# Altium PCB T61_LC_Scanner.PcbDoc
Units mm, origin at the board's own origin, x right, y up, seen from the top; angles counter-clockwise.
Board outline 49.8 x 49.8 mm, 4 copper layers (Top, Route2, Route15, Bottom), stack 0.461 mm thick; 16 components, 35 nets, 111 pads, 17 vias.
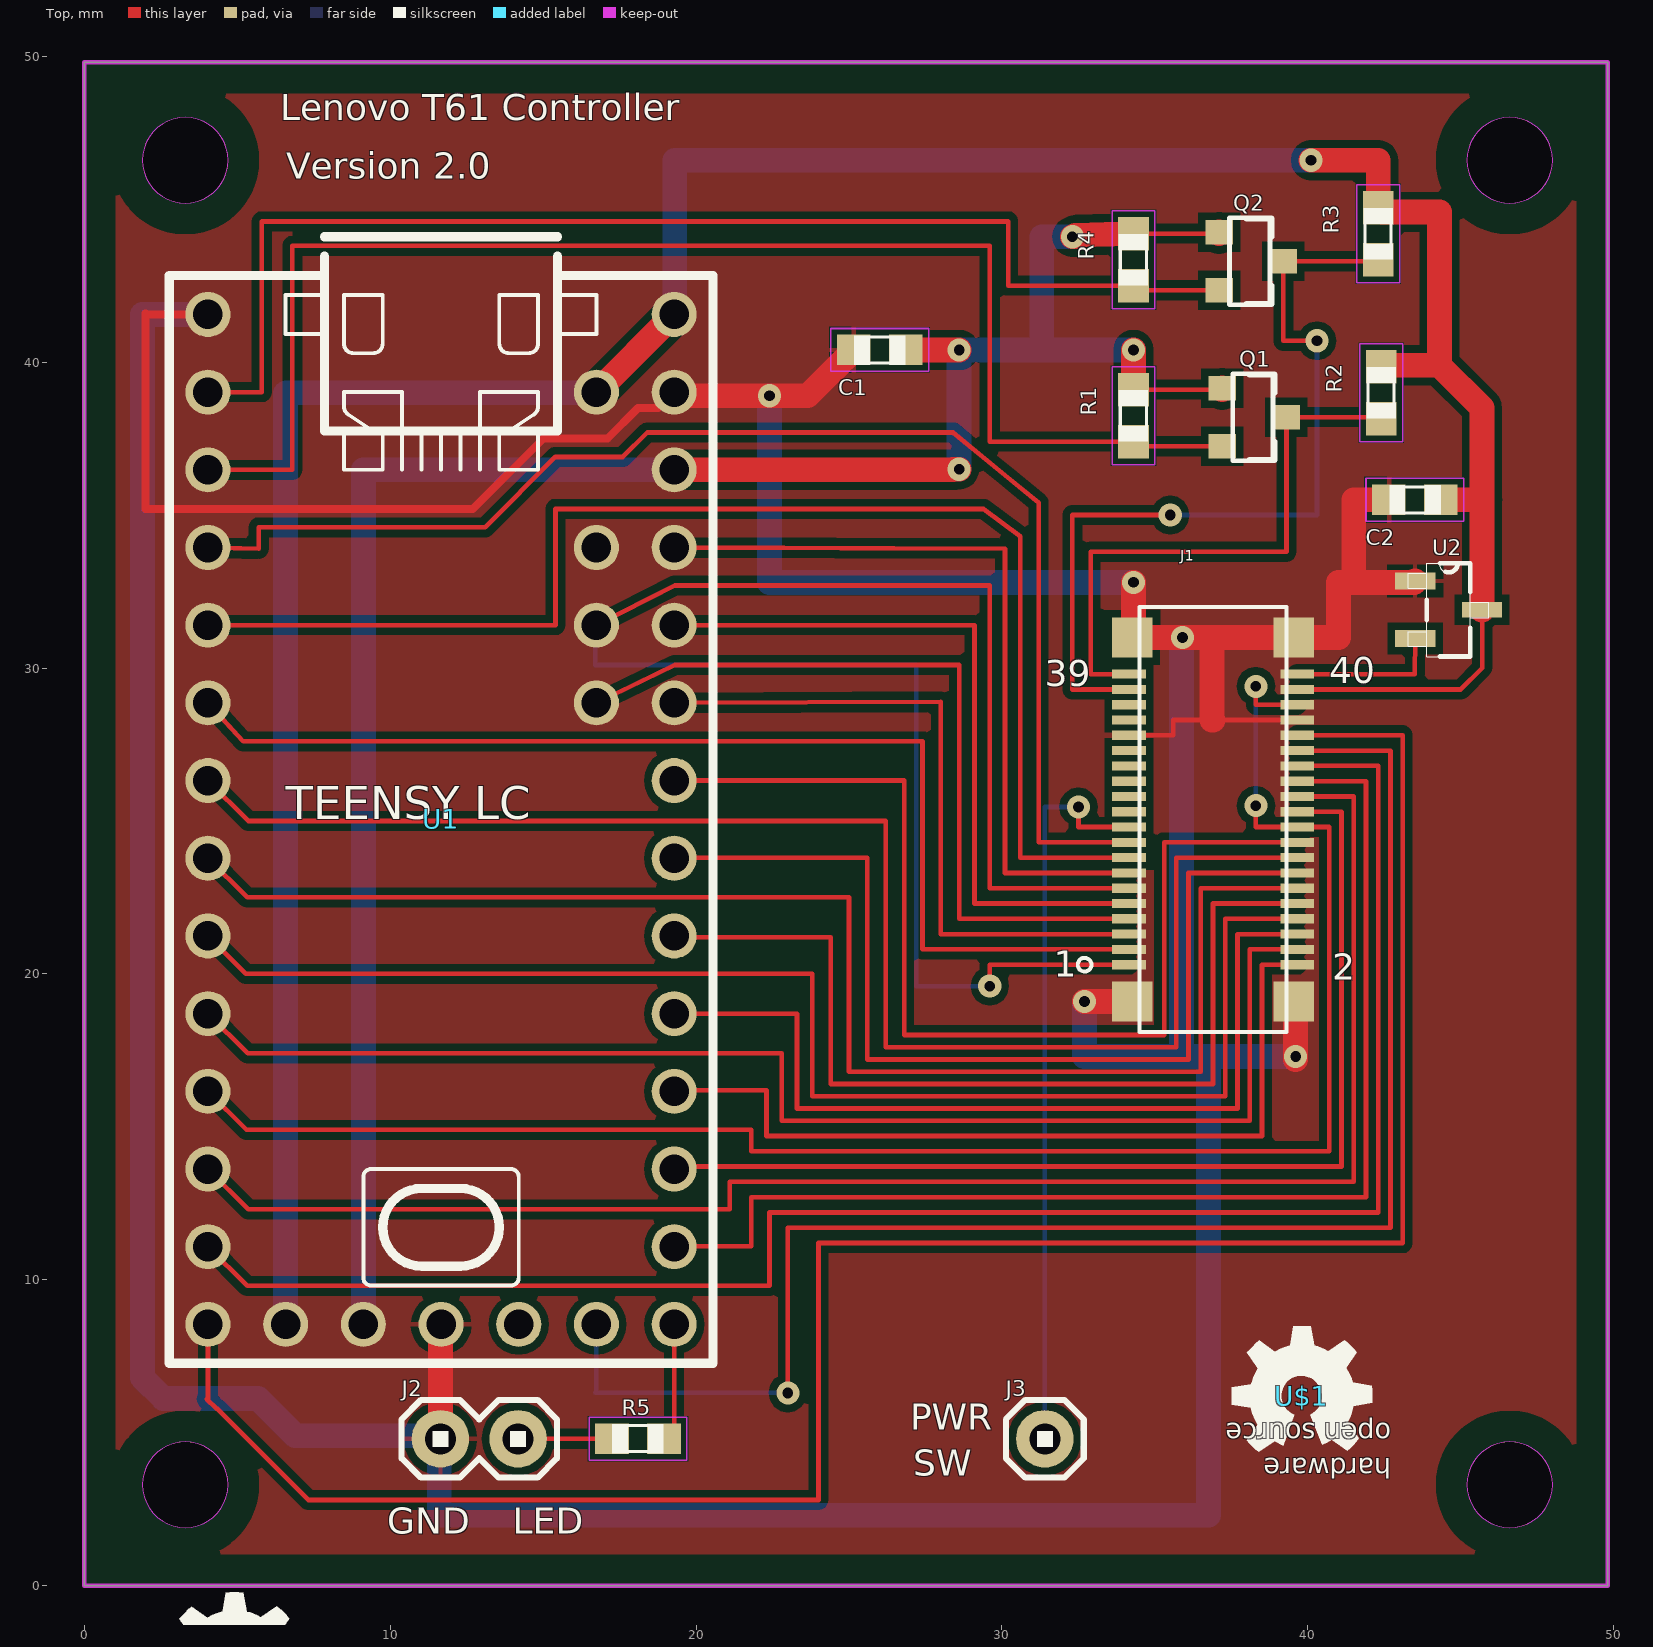
[diagram p0: Top view]
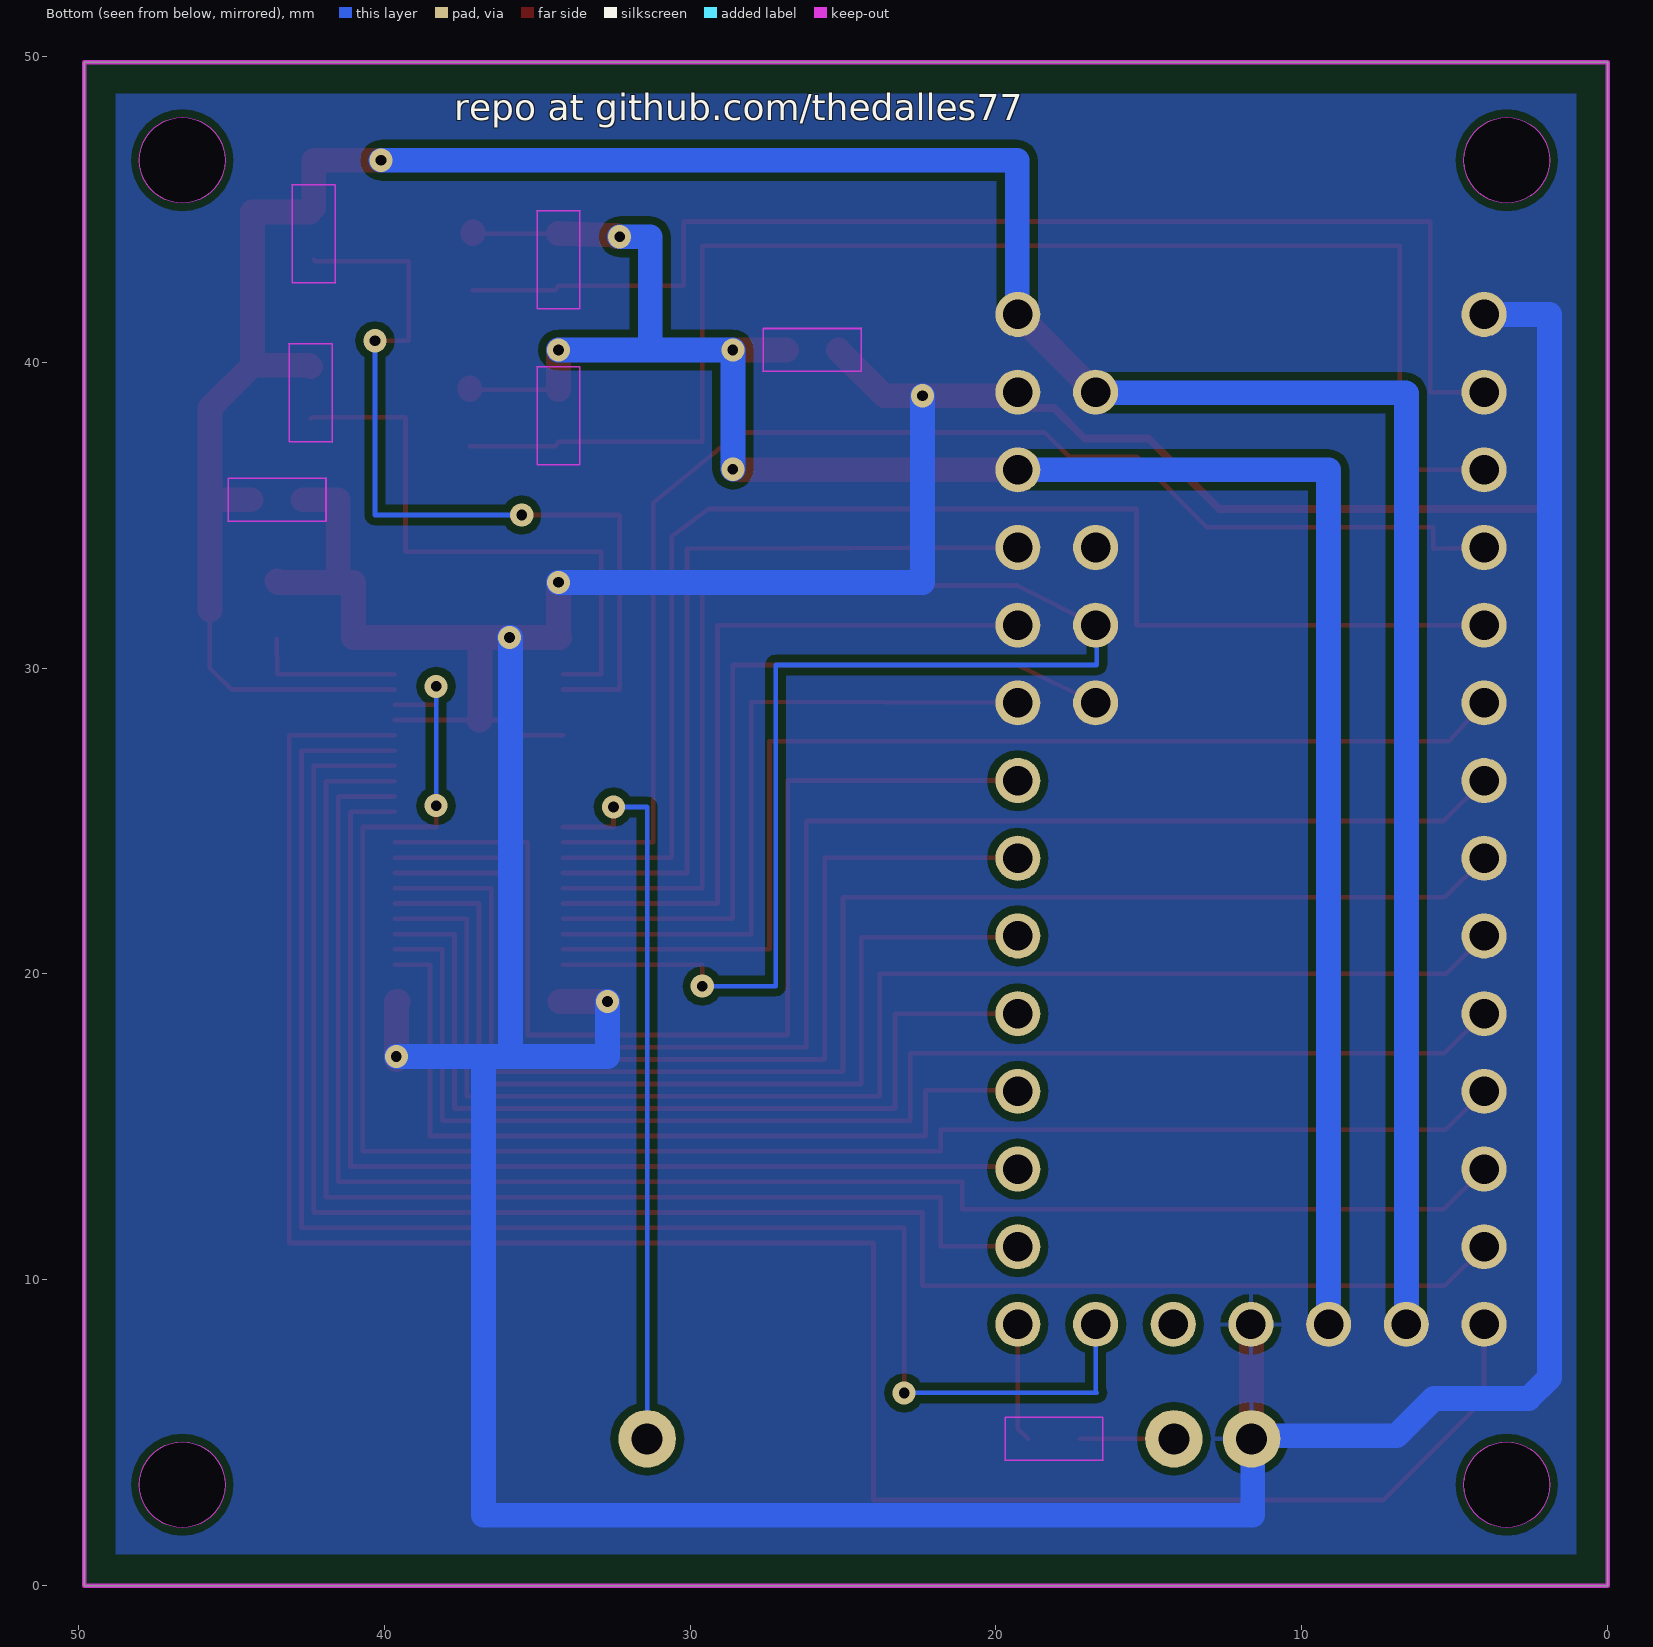
[diagram p1: Bottom view, seen from below]

## Layer stack, top to bottom
Top Solder: solder mask 0.0102, Solder Resist, Dk 3.5
Top: signal copper 0.035
Dielectric 1: dielectric 0.32, FR-4, Dk 4.8
Route2: signal copper 0.0356
Route15: signal copper 0.0356
Bottom: signal copper 0.035
Bottom Solder: solder mask 0.0102, Solder Resist, Dk 3.5

## Board outline
0,49.8 0,0 49.8,0 49.8,49.8
cut-out: 46.6,45.2 ccw(c46.6,46.6) 48,46.6 ccw(c46.6,46.6) 46.6,48 ccw(c46.6,46.6) 45.2,46.6 ccw(c46.6,46.6)
cut-out: 3.3,45.2 ccw(c3.3,46.6) 4.7,46.6 ccw(c3.3,46.6) 3.3,48 ccw(c3.3,46.6) 1.9,46.6 ccw(c3.3,46.6)
cut-out: 3.3,1.9 ccw(c3.3,3.3) 4.7,3.3 ccw(c3.3,3.3) 3.3,4.7 ccw(c3.3,3.3) 1.9,3.3 ccw(c3.3,3.3)
cut-out: 46.6,1.9 ccw(c46.6,3.3) 48,3.3 ccw(c46.6,3.3) 46.6,4.7 ccw(c46.6,3.3) 45.2,3.3 ccw(c46.6,3.3)

## Design rules (kind name [scope] priority, off if disabled: settings)
BoardOutlineClearance mdCopperDimension [All] p1: gap=0.254 ignorepadtopadclearanceinfootprint=FALSE except(0: Arc-SplitContinuation Track-SplitContinuation SMDPad-SplitContinuation THPad-SplitContinuation Via-SplitContinuation Fill-SplitContinuation Poly-SplitContinuation Region-SplitContinuation Text-SplitContinuation; 1.016: Poly-OutlineEdge Poly-CavityEdge Poly-CutoutEdge Poly-SplitBarrior)
Clearance Clearance_for_PolygonClass_Isolate_10 [InPolygonClass('Isolate_10') vs IsArc Or IsTrack Or IsPad Or IsVia Or IsFill Or IsRegion Or IsText] p1: gap=0.254 ignorepadtopadclearanceinfootprint=FALSE
Clearance "Clearance (Same Net)" [All] p2: gap=0.152 ignorepadtopadclearanceinfootprint=FALSE
Clearance [All] p3: gap=0.152 ignorepadtopadclearanceinfootprint=FALSE
HoleSize [All] p1: absolutevalues=TRUE maxlimit=2540 minlimit=0.35 maxpercent=80.000 minpercent=20.000
HoleToHoleClearance mdDrill [All] p1: gap=0.152 allowstackedmicrovias=TRUE
MinimumSolderMaskSliver [All] p1 off: minsoldermaskwidth=0.254
PasteMaskExpansion mlMinCreamFrame [All] p1: expansion=0
PolygonConnect PolygonConnect_For_PolygonThermal_ON_Width60000_Gap100000 [InPolygonClass('PolygonThermal_ON_Width60000_Gap100000') vs Not IsVia] p1: connectstyle=Relief reliefconductorwidth=0.152 reliefentries=4 polygonreliefangle="90 Angle" airgapwidth=0.254
PolygonConnect ThermalVias [IsVia] p2: connectstyle=Direct reliefconductorwidth=0.254 reliefentries=4 polygonreliefangle="90 Angle" airgapwidth=0.254
PolygonConnect [All] p3: connectstyle=Relief reliefconductorwidth=0.254 reliefentries=4 polygonreliefangle="90 Angle" airgapwidth=0.254
RoutingVias [All] p1: holewidth=0.35 width=0.756 viastyle="Through Hole" minholewidth=0.35 minwidth=0.756 maxholewidth=2.54 maxwidth=2.54
SolderMaskExpansion mlMinStopFrame [All] p1: expansion=0.102 istentingtop=FALSE
Width [All] p1: maxlimit=0.254 minlimit=0.152 preferedwidth=0.152
26 further rules are at their usual default settings.

## Classes and differential pairs
polygon class PolygonThermal_ON_Width60000_Gap100000: Polygon_1_Net_GND Polygon_2_Net_GND
polygon class Isolate_10: Polygon_1_Net_GND Polygon_2_Net_GND

## Components (designator, comment, footprint, x,y, rotation, side; value= is the part's Value field where it differs from the comment)
C1 "0.1uF" 0603 26,40.4 r180 top
C2 "0.1uF" 0603 43.5,35.5 r180 top
GOLD_ORB_SM1 "" OSHW_5MM 4.9,-2.5 r0 top
J1 "WM6787CT-ND" WM6787CT-ND 37,25 r90 top
J2 "2" 1X02 11.64,4.8 r0 top
J3 "3" 1X01 31.4,4.8 r0 top
Q1 "220mA/50V/3.5Ω" SOT23-3 38.2,38.2 r270 top
Q2 "220mA/50V/3.5Ω" SOT23-3 38.1,43.3 r270 top
R1 "10k" 0603 34.3,38.25 r90 top
R2 "10k" 0603 42.4,39 r90 top
R3 "10k" 0603 42.3,44.2 r90 top
R4 "10k" 0603 34.3,43.35 r90 top
R5 "715" 0603 18.1,4.8 r0 top
U1 "" TEENSY_LC 11.66,25.05 r270 top
U2 "" SOT95P237X112-3N 44.6,31.9 r0 top
U$1 "" OSHW_5MM 39.8,6.2 r0 top

## Footprints (in the part's own frame and the unit in brackets; to place one, negate y for a bottom-side part, rotate by r counter-clockwise, add the part's x,y. Pads: shape width x height; smd on the part's side, far side on the other; paste and mask are expansions set on the pad)
1X01 [mil] "1X01"
  round 74 hole 40: 1(0,0)
  silkscreen extent -50,-50 50,50
1X02 [mil] "1X02"
  round 74 hole 40: 1(0,0) 2(100,0)
  silkscreen extent -50,-50 150,50
0603 [mm] "0603"
  rect 1.1x1 smd: 1(-0.85,0) 2(0.85,0)
  Keep-Out Layer lines w0.051: 1.6,0.7 1.6,-0.7 -1.6,-0.7 -1.6,0.7 1.6,0.7
  silkscreen extent -0.84,-0.47 0.83,0.48
OSHW_5MM [mm] "OSHW_5MM"
  silkscreen extent -2.29,-1.83 2.31,2.29
SOT23-3 [mil] "SOT23-3"
  rect 31.5x35.43 smd: 1(-37.4,-39.37) 2(37.4,-39.37) 3(0,43.31)
  silkscreen extent -56,-26 56,28
SOT95P237X112-3N [mil] "SOT95P237X112-3N"
  rect 52x22 smd: 1(-43,37) 2(-43,-37)
  rect 52x20 smd: 3(43,0)
  silkscreen extent -52,-60 52,60
TEENSY_LC [mil] "TEENSY_LC"
  round 58 hole 38: 0(-550,-300) 1(-450,-300) 2(-350,-300) 3(-250,-300) 3V1(-450,300) 3V2(650,-100) 4(-150,-300) 5(-50,-300) 5V(-650,300) 6(50,-300) 7(150,-300) 8(250,-300) 9(350,-300) 10(450,-300) 11(550,-300) 12(650,-300) 13(650,300) 14(550,300) 15(450,300) 16(350,300) 17(250,300) 18(150,300) 19(50,300) 20(-50,300) 21(-150,300) 22(-250,300) 23(-350,300) 24(-250,200) 25(-150,200) 26(650,200) AREF(-350,200) GND1(-650,-300) GND2(-550,300) GND3(650,0) PGM(650,100) VIN(650,-200) VUSB(-550,200)
  silkscreen extent -750,-350 700,350
WM6787CT-ND [mm] "WM6787CT-ND"
  rect 0.3x1.1 smd: P$1(-4.7,2.85) P$2(-4.7,-2.65) P$3(-4.2,2.85) P$4(-4.2,-2.65) P$5(-3.7,2.85) P$6(-3.7,-2.65) P$7(-3.2,2.85) P$8(-3.2,-2.65) P$9(-2.7,2.85) P$10(-2.7,-2.65) P$11(-2.2,2.85) P$12(-2.2,-2.65) P$13(-1.7,2.85) P$14(-1.7,-2.65) P$15(-1.2,2.85) P$16(-1.2,-2.65) P$17(-0.7,2.85) P$18(-0.7,-2.65) P$19(-0.2,2.85) P$20(-0.2,-2.65) P$21(0.3,2.85) P$22(0.3,-2.65) P$23(0.8,2.85) P$24(0.8,-2.65) P$25(1.3,2.85) P$26(1.3,-2.65) P$27(1.8,2.85) P$28(1.8,-2.65) P$29(2.3,2.85) P$30(2.3,-2.65) P$31(2.8,2.85) P$32(2.8,-2.65) P$33(3.3,2.85) P$34(3.3,-2.65) P$35(3.8,2.85) P$36(3.8,-2.65) P$37(4.3,2.85) P$38(4.3,-2.65) P$39(4.8,2.85) P$40(4.8,-2.65)
  rect 1.3x1.32 smd: P$41(-5.9,2.74) P$42(-5.9,-2.54) P$43(6,2.74) P$44(6,-2.54)
  silkscreen extent -6.9,-2.3 7,4.52

## Part data
C1 C2 R1 R2 R3 R4 R5: library part 0603, PackageName=0603
GOLD_ORB_SM1 U$1: library part OSHW_5MM, PackageName=OSHW_5MM
J2: library part 1X02, PackageName=1X02
J3: library part 1X01, PackageName=1X01
Q1 Q2: library part SOT23-3, PackageName=SOT23-3
U1: library part TEENSY_LC, PackageName=TEENSY_LC
U2: library part SOT95P237X112-3N, PackageName=SOT95P237X112-3N
J1: PackageName=WM6787CT-ND

## Free pads (board coordinates)
  round 2.8 hole 2.8 unplated: MH1(3.3,3.3) MH2(46.6,3.3) MH3(46.6,46.6) MH4(3.3,46.6)

## Via types
v1: diameter 0.756/0.756/0.756/0.756 (per signal layer), hole 0.35, Top to Bottom, 17 vias

## Nets (pads, with @x,y where several pads share a name; then routed paths per layer and width w, separated by ;. In a path a pad name is that pad's centre, name@x,y a point inside that pad or via, vN(x,y) a via of type N, cw(c..) or ccw(c..) an arc to the next point about the centre after c; other vN are vias at no path point)
3V: C1.1 Q1.1 Q2.1 R1.2 R4.2 U1.3V1 U1.3V2 | length 72.6
  Top w0.152: R1.2 Q1.1@37.2,39.1 ; R4.2 Q2.1@37.1,44.2
  Top w0.813: U1.3V1 28.4,36.48 28.4,36.5 v1(28.6,36.5) ; C1.1 v1(28.6,40.4) ; v1(32.3,44.1) 32.4,44.1 32.4,44.15 R4.2 ; R1.2 v1(34.3,40.4) ; Q2.1@37.1,44.2 Q2.1 ; Q1.1@37.2,39.1 Q1.1
  Bottom w0.813: U1.3V2 9.12,36.48 U1.3V1 ; v1(28.6,36.5) v1(28.6,40.4) 31.3,40.4 ; v1(32.3,44.1) 31.3,44.1 31.3,40.4 ; v1(34.3,40.4) 31.3,40.4
5V: C2.1 J1.P$38 R2.2 R3.2 U1.5V U1.VIN U1.VUSB U2.3 | length 101.9
  Top w0.152: J1.P$38 45,29.3 45.7,30 45.7,31.892 U2.3 ; R3.2 42.3,44.908 43.3,44.908
  Top w0.813: U1.VUSB U1.5V ; v1(40.1,46.6) 42.3,46.6 R3.2 ; R2.2 42.45,39.9 44.3,39.9 ; R3.2@42.441,44.908 43.3,44.908 44.3,44.908 44.3,39.9 ; C2.1 45.7,35.5 45.692,35.492 ; U2.3 45.692,35.492 ; 44.3,39.9 45.692,38.508 45.692,35.492
  Bottom w0.813: U1.VIN 6.58,38.98 6.6,39 16.72,39 U1.VUSB ; U1.5V 19.3,41.58 19.3,46.6 v1(40.1,46.6)
CAPS_LCK: J2.2 R5.1 | length 3.1
  Top w0.152: J2.2 R5.1
CLK: Q1.2 R1.1 U1.1 | length 47
  Top w0.152: U1.1 6.8,36.48 6.8,43.8 29.6,43.8 29.6,37.4 R1.1 34.4,37.25 Q1.2
DATA: Q2.2 R4.1 U1.0 | length 40.8
  Top w0.152: U1.0 5.8,39.02 5.8,44.6 30.2,44.6 30.2,42.5 R4.1 34.4,42.35 Q2.2
DRV(9): J1.P$20 J1.P$36 U1.9 | length 57.4
  Top w0.152: U1.9 5.3,14.9 21.8,14.9 21.8,14.2 40.7,14.2 40.7,24.8 J1.P$20 38.3,24.8 v1(38.3,25.5) ; v1(38.3,29.4) 38.3,28.8 J1.P$36
  Bottom w0.152: v1(38.3,25.5) v1(38.3,29.4)
GND: C1.2 C2.2 J1.P$31 J1.P$34 J1.P$41 J1.P$42 J1.P$43 J1.P$44 J2.1 U1.GND1 U1.GND2 U1.GND3 U2.1 | length 197.2
  Top w0.152: U1.GND3@11.64,8.52 U1.GND3 ; J1.P$31 35.6,27.8 35.6,28.3 36.9,28.3 J1.P$34
  Top w0.254: U1.GND1 2.04,41.56 2,41.6 2,35.2 12.7,35.2 15,37.5 17.1,37.5 18.1,38.5 18.76,38.5 U1.GND2
  Top w0.813: J2.1 U1.GND3@11.64,8.52 ; U1.GND2 19.4,38.9 v1(22.4,38.9) 23.65,38.9 C1.2 ; v1(32.7,19.1) J1.P$41 ; v1(34.3,32.8) 34.3,31 J1.P$43 v1(35.9,31) 36.869,31 ; 36.9,28.3 36.869,28.3 36.869,31 ; J1.P$42 39.6,19.1 v1(39.6,17.3) v1@39.6,17.2 ; C2.2 41.5,35.5 41.5,32.826 41.526,32.8 ; U2.1 43.468,32.8 41.526,32.8 ; 36.869,31 J1.P$44 41,31 41,32.8 41.526,32.8
  Bottom w0.813: U1.GND1 1.9,41.56 1.9,6.8 2.578,6.122 5.678,6.122 6.9,4.9 11.54,4.9 J2.1 11.6,4.8 11.6,2.3 36.753,2.3 36.753,17.3 ; v1(22.4,38.9) 22.4,32.8 v1(34.3,32.8) ; v1(32.7,19.1) 32.7,17.3 35.868,17.3 ; v1(35.9,31) 35.868,31 35.868,17.3 ; v1(39.6,17.3) 36.753,17.3 ; 35.868,17.3 36.753,17.3
LED_13: R5.2 U1.13 | length 3.9
  Top w0.152: R5.2 19.28,5.13 U1.13
N$1: J1.P$5 U1.21 | length 22.5
  Top w0.152: U1.21 28,28.9 28,21.3 J1.P$5
N$2: J1.P$13 U1.23 | length 25.5
  Top w0.152: U1.23 30.1,33.9 30.1,23.3 J1.P$13
N$3: J1.P$9 U1.22 | length 24
  Top w0.152: U1.22 29.1,31.4 29.1,22.3 J1.P$9
N$4: J1.P$7 U1.25 | length 26
  Top w0.152: U1.25 19.3,30.1 28.6,30.1 28.6,21.8 J1.P$7
N$5: J1.P$3 U1.4 | length 37.5
  Top w0.152: U1.4 5.2,27.6 27.4,27.6 27.4,20.8 J1.P$3
N$6: J1.P$15 U1.3 | length 44.7
  Top w0.152: U1.3 15.4,31.4 15.4,35.2 29.4,35.2 30.6,34.3 30.6,23.8 J1.P$15
N$7: J1.P$17 U1.2 | length 44
  Top w0.152: U1.2 5.7,33.9 5.7,34.6 13.1,34.6 15.4,36.9 17.6,36.9 18.4,37.7 28.4,37.7 30.1,36.3 31.2,35.4 31.2,24.3 J1.P$17
N$8: J1.P$22 U1.15 | length 34.9
  Top w0.152: U1.15 19.28,13.7 41.1,13.7 41.1,25.3 J1.P$22
N$9: J1.P$18 U1.20 | length 35
  Top w0.152: U1.20 26.8,26.32 26.8,18 35.3,18 35.3,24.3 J1.P$18
N$10: J1.P$14 U1.19 | length 33.1
  Top w0.152: U1.19 19.28,23.8 25.6,23.8 25.6,17.2 36.1,17.2 36.1,23.3 J1.P$14
N$11: J1.P$10 U1.18 | length 31.1
  Top w0.152: U1.18 19.28,21.2 24.4,21.2 24.4,16.4 36.9,16.4 36.9,22.3 J1.P$10
N$12: J1.P$2 U1.16 | length 27.5
  Top w0.152: U1.16 19.28,16.2 22.3,16.2 22.3,14.7 38.5,14.7 38.5,20.3 J1.P$2
N$13: J1.P$4 U1.8 | length 43.9
  Top w0.152: U1.8 5.34,17.4 22.8,17.4 22.8,15.2 38.1,15.2 38.1,20.8 J1.P$4
N$14: J1.P$8 U1.7 | length 45.9
  Top w0.152: U1.7 5.28,20 23.8,20 23.8,16 37.3,16 37.3,21.8 J1.P$8
N$15: J1.P$12 U1.6 | length 47.8
  Top w0.152: U1.6 5.32,22.5 25,22.5 25,16.8 36.5,16.8 36.5,22.8 J1.P$12
N$16: J1.P$6 U1.17 | length 29.2
  Top w0.152: U1.17 23.3,18.7 23.3,15.6 37.7,15.6 37.7,21.3 J1.P$6
N$17: J1.P$16 U1.5 | length 49.8
  Top w0.152: U1.5 5.36,25 26.2,25 26.2,17.6 35.7,17.6 35.7,23.8 J1.P$16
N$18: J1.P$24 U1.10 | length 53.4
  Top w0.152: U1.10 5.36,12.3 21.1,12.3 21.1,13.2 41.5,13.2 41.5,25.8 J1.P$24
N$19: J1.P$28 U1.11 | length 58.4
  Top w0.152: U1.11 5.32,9.8 22.4,9.8 22.4,12.2 42.3,12.2 42.3,26.8 J1.P$28
N$20: J1.P$32 U1.12 | length 71.4
  Top w0.152: U1.12 4.04,6.1 4,6.1 4.308,5.792 4.332,5.792 7.325,2.8 24,2.8 24,11.2 43.1,11.2 43.1,27.8 J1.P$32
N$21: J1.P$26 U1.14 | length 40.1
  Top w0.152: U1.14 19.28,11.1 21.8,11.1 21.8,12.7 41.9,12.7 41.9,26.3 J1.P$26
N$22: J1.P$30 U1.26 | length 52.3
  Top w0.152: v1(23,6.3) 23,11.7 42.7,11.7 42.7,27.3 J1.P$30
  Bottom w0.152: U1.26 16.74,6.34 16.7,6.3 v1(23,6.3)
PWR_SW: J1.P$19 J3.1 | length 24.2
  Top w0.152: v1@32.5,25.5 v1(32.5,25.457) 32.5,24.8 J1.P$19
  Bottom w0.152: J3.1 31.4,9.462 ; 31.4,9.4 31.4,9.462 ; v1(32.5,25.457) 31.4,25.457 31.4,9.462
SENSE(4): J1.P$1 J1.P$11 U1.24 | length 57.6
  Top w0.152: U1.24 19.3,32.7 29.6,32.7 29.6,22.8 J1.P$11 ; v1(29.6,19.6) 29.6,20.3 J1.P$1
  Bottom w0.152: U1.24 16.7,31.36 16.7,30.1 27.2,30.1 27.2,19.6 v1(29.6,19.6)
TP_CLK: J1.P$39 Q1.3 R2.1 | length 19.2
  Top w0.152: J1.P$39 32.9,29.8 32.9,33.8 39.3,33.8 Q1.3 42.35,38.2 R2.1
TP_DATA: J1.P$37 Q2.3 R3.1 | length 28.1
  Top w0.152: J1.P$37 32.3,29.3 32.3,35 v1(35.5,35) ; v1(40.3,40.7) 39.2,40.7 Q2.3 42.25,43.3 R3.1
  Bottom w0.152: v1(35.5,35) 40.3,35 v1(40.3,40.7)
TP_RST: J1.P$40 U2.2 | length 5
  Top w0.152: J1.P$40 43.5,29.8 U2.2
pads on no net: J1.P$21 J1.P$23 J1.P$25 J1.P$27 J1.P$29 J1.P$33 J1.P$35 U1.AREF U1.PGM

## Polygon pours and split planes (outlines as drawn)
GND on Top "Polygon_1_Net_GND" (solid, remove dead copper, pour order 1): -0.076,-0.076 -0.076,49.876 49.876,49.876 49.876,-0.076
GND on Bottom "Polygon_2_Net_GND" (solid, remove dead copper, pour order 0): -0.076,-0.076 -0.076,49.876 49.876,49.876 49.876,-0.076

## Keep-outs
Keep-Out Layer:
  the board outline again, w0.152

## Silkscreen, mask and mechanical layers (free items; w line width, h text height)
Top Overlay:
  text "Lenovo T61 Controller" at 6.4,47.9 h0.86
  text "Version 2.0" at 6.6,46 h0.86
  text "40" at 40.7,29.5 h0.86
  text "39" at 31.4,29.4 h0.86
  text "1" at 31.7,19.9 h0.86
  text "2" at 40.8,19.8 h0.86
  text "PWR" at 27,5.1 h0.86
  text "SW" at 27.1,3.6 h0.86
  text "GND" at 9.9,1.7 h0.86
  text "LED" at 14,1.7 h0.86
Bottom Overlay:
  text "repo at github.com/thedalles77" at 37.7,47.9 h0.86
Dimension:
  the board outline again, w0.152

## Text inside footprints (layer, text, board x,y; h text height)
GOLD_ORB_SM1: Top Overlay "hardware" at 7.821,-4.532 h0.65 r180; Top Overlay "open source" at 7.821,-3.389 h0.65 r180
U1: Top Overlay "TEENSY LC" at 6.58,25.05 h1.08
U2: Top Value "TLV810" at 43.046,29.481 h0.52
U$1: Top Overlay "hardware" at 42.721,4.168 h0.65 r180; Top Overlay "open source" at 42.721,5.311 h0.65 r180